# Allegro board CLAYR6.brd
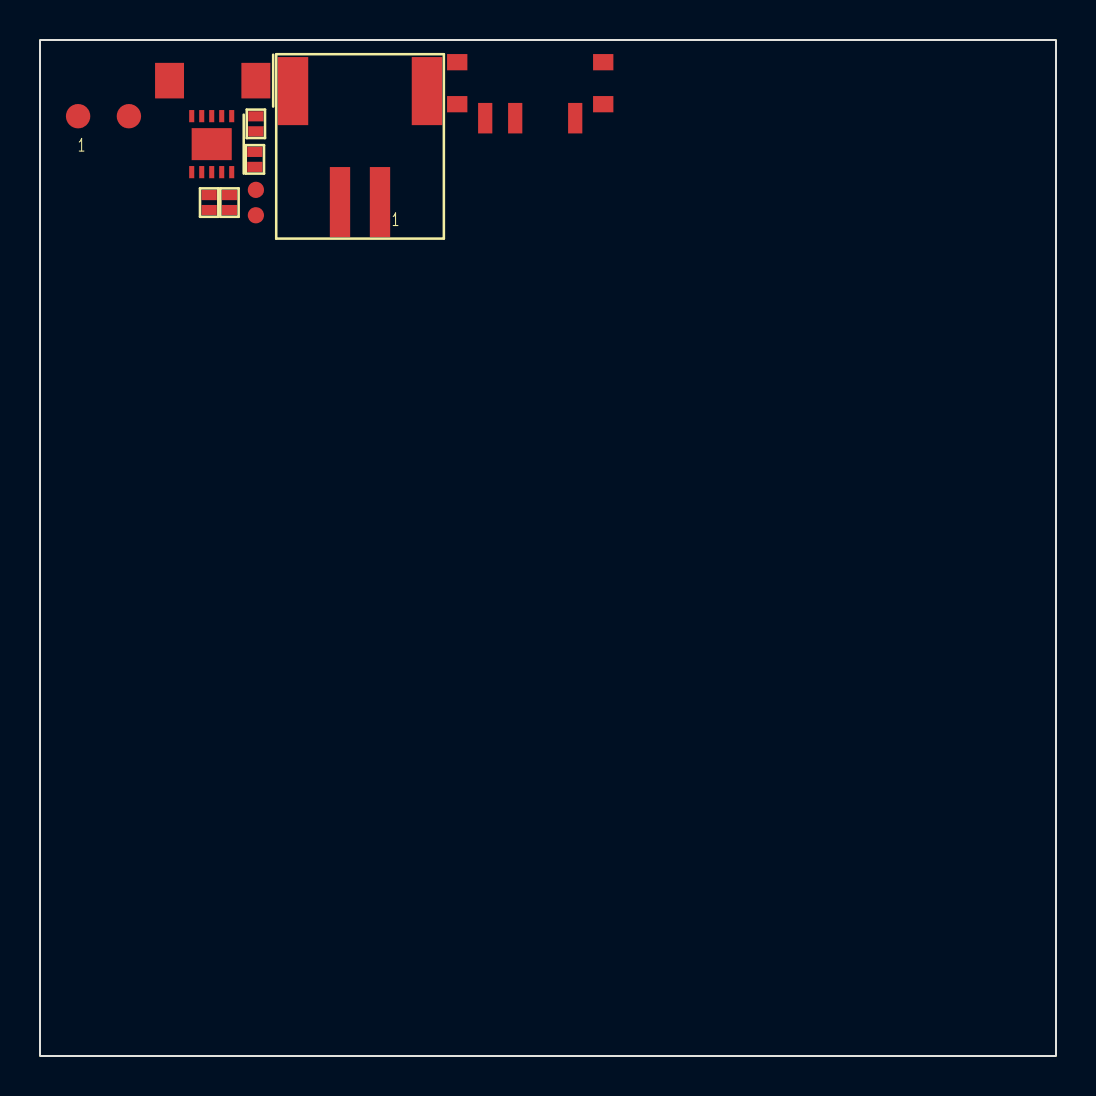
[diagram p0: board, top side]
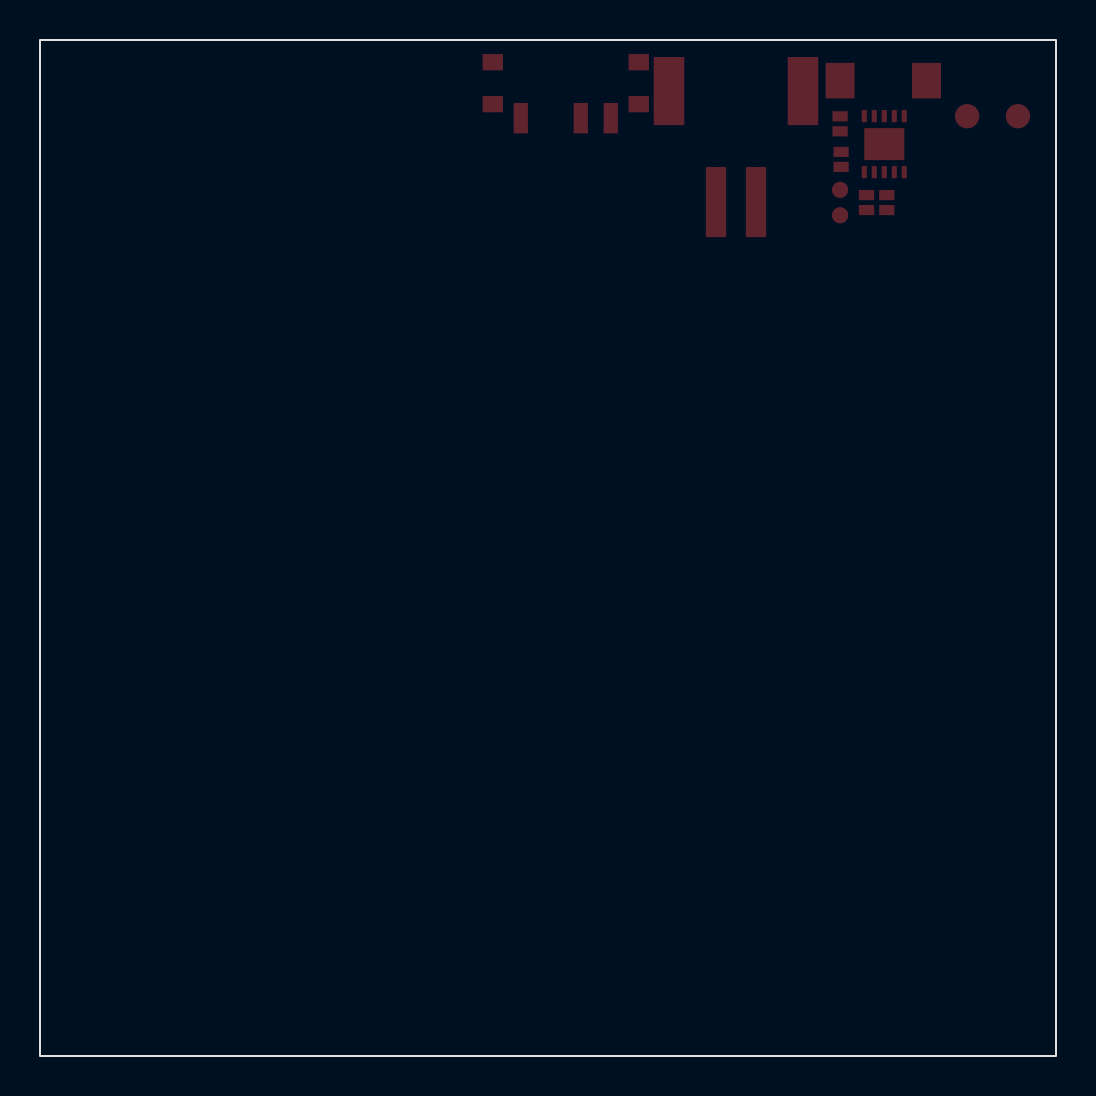
[diagram p1: board, bottom side, seen from below]

Outline 50.8 x 50.8 mm; copper layers: TOP, GND, PWR, BOTTOM. Coordinates in mm from the lower left corner of the outline.

## Placement (name value [footprint] x y rotation side)
C1  1uF  [C0402]  10.74 44.83 90 top
C3  1uF  [C0402]  10.79 46.61 270 top
D1  SE20AFJ-M3/6A  [DO_221AC]  8.64 48.77 180 top
J1  640456-2  [2X1_HEADER_100]  1.9 46.99 0 top
J2  S2B-PH-SM4-TB(LF)(SN)  [JST2_SIDE_SMT]  16 46.35 0 top
NOREF  -  []  25.4 25.4 0 top
NOREF#2  -  []  0 0 90 top
NOREF#3  -  []  0 50.8 0 top
R1  10k  [R0402]  9.47 42.67 90 top
R2  3.0k  [R0402]  8.46 42.67 90 top
SW1  CUS-12TB  [CUS_12TB]  24.51 48.64 180 top
U1  LM3658  [WSON10_3X3]  8.59 45.59 180 top
W1  26AWG  [WIRE_26AWG]  10.79 43.31 180 top
W2  26AWG  [WIRE_26AWG]  10.79 42.04 180 top

## Library data of the parts
C1 C3 = CAP_NP
D1 = DIODE
J1 J2 = CON_2PIN
R1 R2 = RESISTOR
SW1 = SWITCH_SPDT
U1 = LM3658
W1 W2 = WIRE

## Footprints (pads in the part's own frame, mm; a bottom-side part is the same pattern mirrored in y, then rotated)
2X1_HEADER_100
  round 1.219 smd: 1(0,0) 2(2.54,0)
C0402
  rect 0.508x0.762 smd: 1(-0.375,0) 2(0.375,0)
CUS_12TB
  rect 1.016x0.813 smd: (-3.65,1.05) (-3.65,-1.05) (3.65,1.05) (3.65,-1.05)
  round 0 smd: (-1.5,0) (1.5,0)
  rect 0.711x1.524 smd: 1(-2.25,1.75) 2(0.75,1.75) 3(2.25,1.75)
DO_221AC
  rect 1.448x1.778 smd: 1(-2.159,0) 2(2.159,0)
JST2_SIDE_SMT
  rect 1.524x3.404 smd: (-3.352,1.891) (3.348,1.891)
  rect 1.016x3.505 smd: 1(0.998,-3.659) 2(-1.002,-3.659)
R0402
  rect 0.508x0.762 smd: 1(-0.375,0) 2(0.375,0)
WIRE_26AWG
  round 0.813 smd: 1(0,0)
WSON10_3X3
  rect 0.254x0.61 smd: 1(-1,-1.4) 2(-0.5,-1.4) 3(0,-1.4) 4(0.5,-1.4) 5(0.999,-1.4) 6(0.999,1.4) 7(0.5,1.4) 8(0,1.4) 9(-0.5,1.4) 10(-1,1.4)
  rect 2.007x1.6 smd: 11(0,0)

## Nets
GND: C1.2 C3.2 J1.2 J2.2 R1.1 R2.1 U1.3(GND#3) U1.11(GND#11) W2.1
VBAT: SW1.1
CHG_OUT: C1.1 J2.1 SW1.2 U1.10(BATT)
EN_B: U1.5(EN_B)
STAT1: U1.7(STAT1)
STAT2: U1.6(STAT2)
USB_SEL: U1.4(USB_SEL)
USBPWR: U1.2(USBPWR)
N00299: R1.2 U1.9(TS) W1.1
N00337: R2.2 U1.8(ISET)
N08855: C3.1 D1.1(C) U1.1(CHG_IN)
N08912: D1.2(A) J1.1

Pads without a net: SW1 3
